# Altium PCB Motherboard.PcbDoc (part 3 of 5)
Units mm, origin at the board's own origin, x right, y up, seen from the top; angles counter-clockwise.
Board outline 133.86 x 67.84 mm, 4 copper layers (Top Layer, Power Plane, Ground Plane, Bottom Layer), stack 1.586 mm thick; 260 components, 155 nets, 877 pads, 1037 vias.
Unrouted connection lines stored in the file: 43.
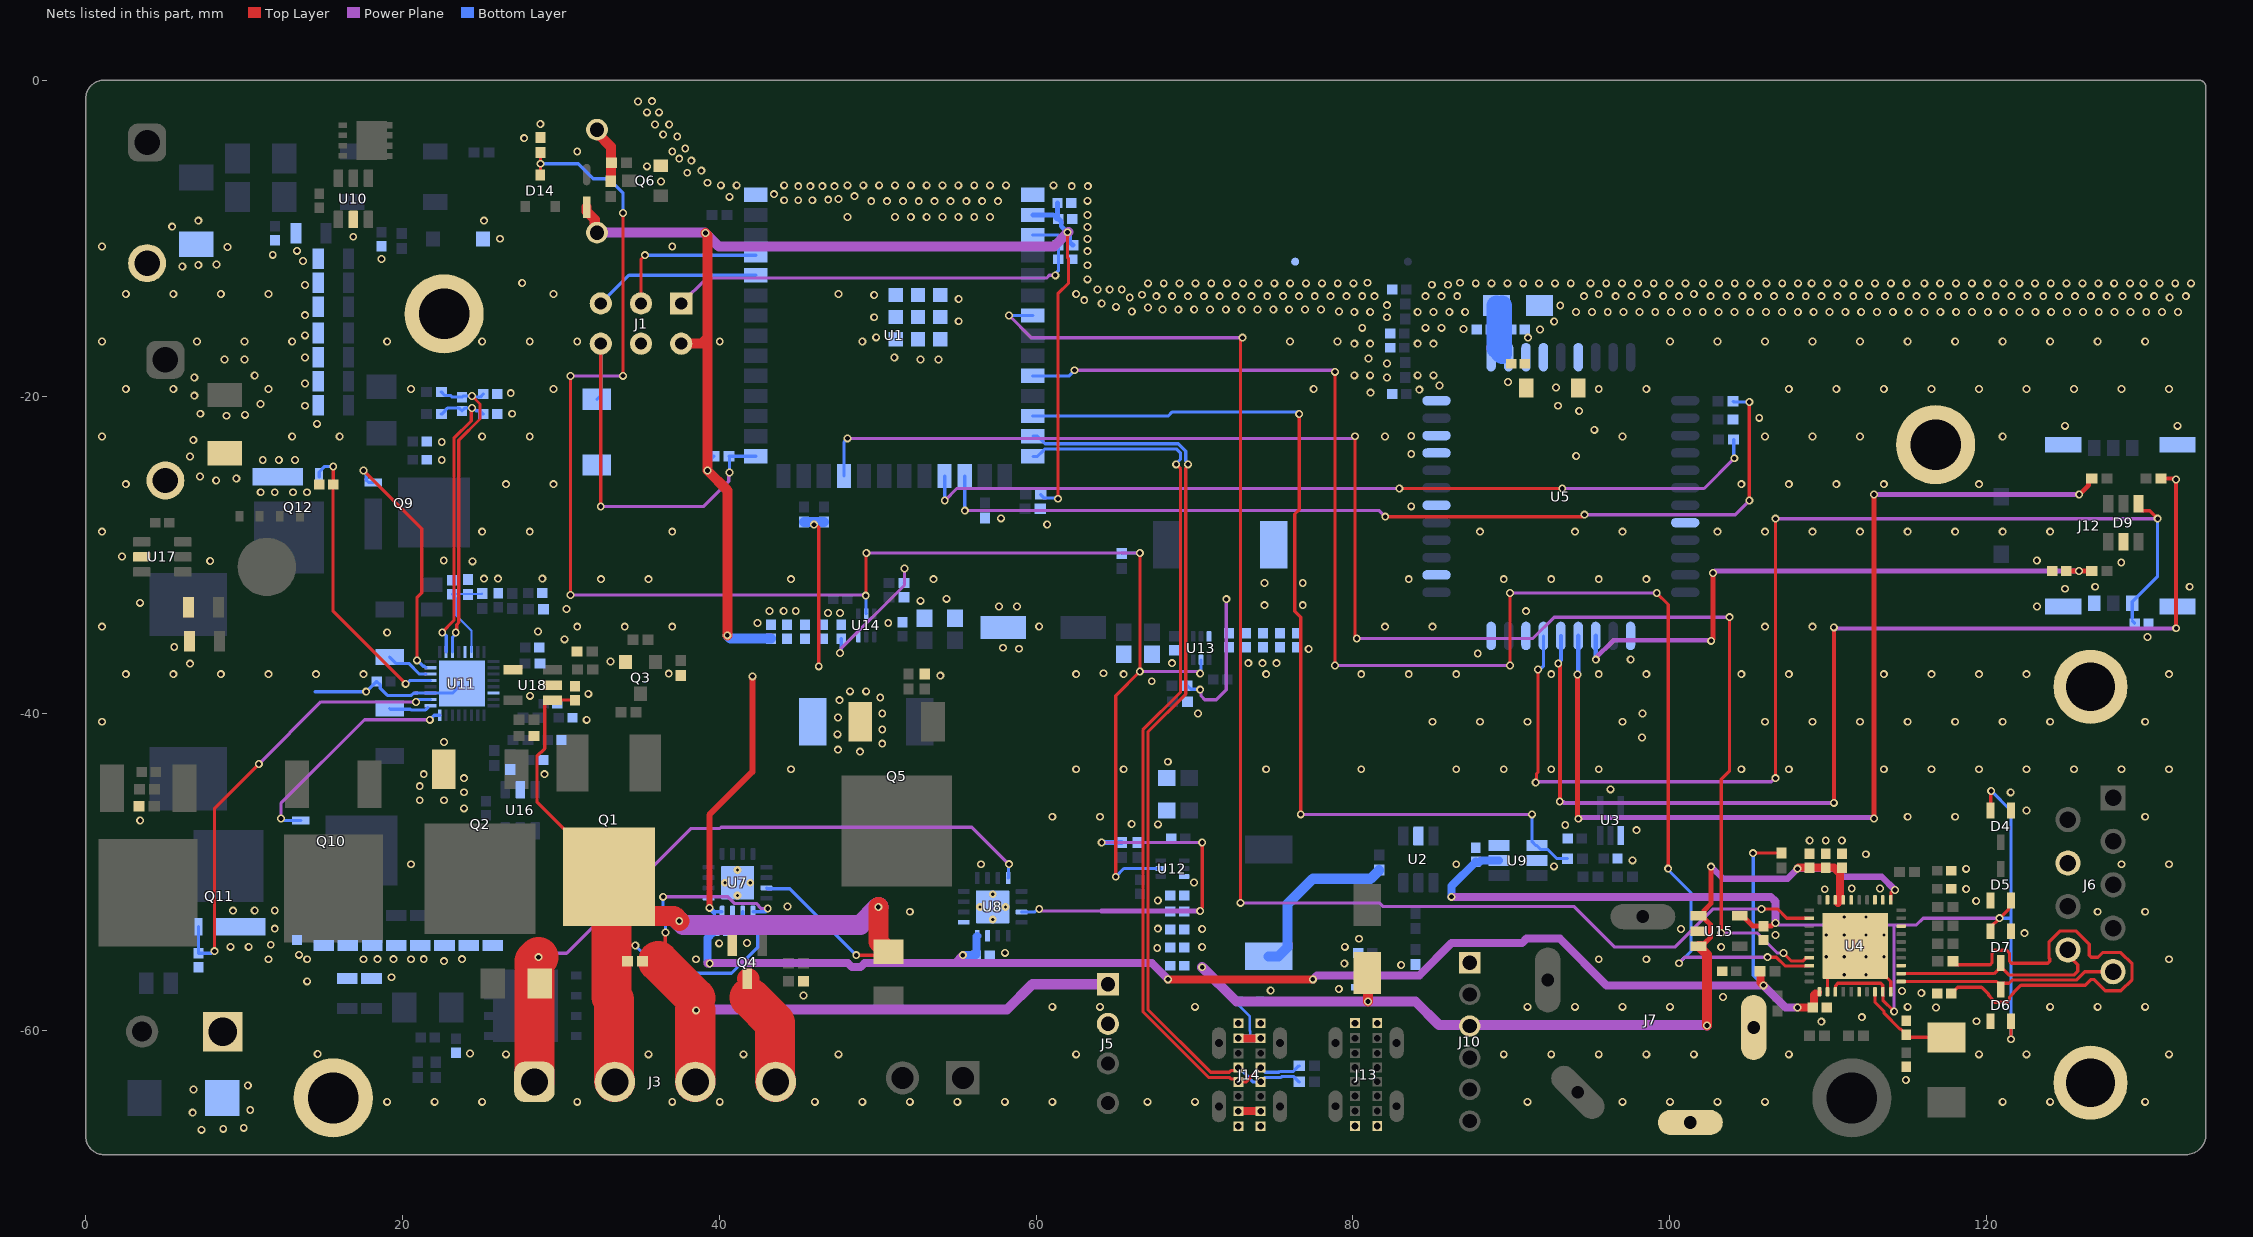
[diagram p4: the nets of this part, all layers, seen from the top]

## Part data (continued)
D14: library part CMP-0417-00003-1, "Schottky Barrier Diode, 30 V, 2 uA, -55 to 150 degC, 3-Pin SOT23, RoHS, Tape and Reel", LCSC_PN=C181200, Manufacturer="NXP Semiconductors", Temperature Range="-55 to 150 degC", Cd (pF)=10, ComponentLink1Description="Manufacturer URL", ComponentLink1URL=http://www.nxp.com/, ComponentLink2Description=Datasheet, ComponentLink2URL=http://www.nxp.com/documents/data_sheet/BAT54_SER.pdf, DatasheetVersion="Rev. 5", IR (uA)=2, Mounting Technology="Surface Mount", PackageDescription="3-Pin Plastic Surface-mounted Package, Body 1.3 x 2.9 mm, Pitch 0.95 mm", PackageReference=SOT23-3, Packing="Tape and Reel", PartNumber=BAT54C, RoHS=TRUE, Rth(j-a) (K/W)=500, Trr (ns)=5, VF (mV)=800, VR (V)=30
D15: library part CMP-2000-05974-1, "Surface Mount Zener Diode, 3 V, -65 to 150 degC, 2-Pin SOD123, RoHS, Tape and Reel", Ir - Reverse Current=10uA, LCSC_PN=C85212, Manufacturer=DiodesIncorporated, Maximum Operating Temperature=+150C, Minimum Operating Temperature=-65C, Package / Case=SOD-123, Package Description="2-Pin Surface Mount Device, Body 2.7 x 1.55 mm", Package Reference=SOD123, Pd - Power Dissipation=500mW, Voltage Temperature Coefficient=-1.75mV/C, Voltage Tolerance=5%, Vz - Zener Voltage=3V, Zener Current=5mA, Brand=DiodesIncorporated, Configuration=Single, Datasheet URL=http://www.diodes.com/_files/datasheets/ds18004.pdf, Datasheet Version="Rev. 37-2, 09/2012", Factory Pack Quantity=3000, Height=1.35mm, Length=2.85mm, Manufacturer URL=http://www.diodes.com/, Mounting Style=SMD/SMT, Mounting Technology=SurfaceMount, Packaging=Reel, Product Category=ZenerDiodes, RoHS=True, Series=BZT52C, Termination Style=SMD/SMT, Unit Weight=0.000353oz, Width=1.7mm, Zz - Zener Impedance=95Ohms
D16: library part CMP-14399-000022-1, "DIODE GEN PURP 100V 250MA SC76-2", LCSC_PN=C549222, RoHS Compliant=Yes
J1: library part CMP-bcf575fbeff46332-1, "Dual Row Connector Female Samtec SLW-103-01-T-D", Color=Black, LCSC_PN=C492420, Manufacturer Part Number=SLW-103-01-T-D, Operating Temperature="105 °C (max)", Voltage Rating (AC)="400 V", Contact Material="Phosphor Bronze", Contact Plating=Tin, Gender=Female, Housing Color=Black, Housing Material=Plastic, Lead-Free Status="Lead Free", Mounting Style="Through Hole, Vertical", Number of Contacts=6, Number of Positions=6, Number of Rows=2, Octopart URL=https://octopart.com/slw-103-01-t-d-samtec-292455, OctopartID=bcf575fbeff46332, Packaging=Tube, Pin Pitch="2.54 mm", REACH SVHC Compliance="No SVHC", RoHS=Compliant, Size-Height="4.57 mm", Size-Length="7.62 mm", Size-Width="4.95 mm"
J3: library part CMP-03913-99613968-2, "Terminal Block PCB Header with Plastic Latches, Through Hole, 5.08mm Pitch, Straight, 4 Poles", LCSC_PN=C441388
J4: "Connector", LCSC_PN=C22365241, Manufacturer_Name="Ningbo Kangnex", Datasheet Link=https://datasheet.lcsc.com/szlcsc/Ningbo-Kangnex-Elec-WJ15EDGVC-3-81-2P_C8396.pdf, Height=9.35mm, Manufacturer_Part_Number=WJ15EDGVC-3.81-2P
J5: library part CMP-17439-000250-1, "CONN HEADER VERT 4POS 2.5MM", Color=Natural, Contact Resistance=20mR, Current Rating=3A, Flammability Rating="UL94 V-0", Housing Color=White, Insulation Resistance=1GR, LCSC_PN=C144395, Max Operating Temperature=85°C, Max Voltage Rating (AC)=250V, Min Operating Temperature=-25°C, Package Quantity=500, Connector Type=Header, Contact Finish - Mating=TIN, Contact Material=Brass, Contact Plating=Tin, Contact Shape=Square, Contact Type="Male Pin", Depth=5.75mm, Fastening Type=Detent, Gender=Male, Housing Material=Polyamide, Insulation Color=Natural, Insulation Material=Nylon, Lead Free="Lead Free", Lead Pitch=2.5mm, Length=12.4mm, Mated Stacking Heights=9.8mm, Material=Polyamide, Max Current Rating=3A, Max Voltage Rating (DC)=250V, Mount="Through Hole", Number of Contacts=4, Number of Positions=4, Number of Rows=1, Orientation=Straight, Packaging=Bulk, Pitch=2.5mm, REACH SVHC="No SVHC", Series=XH, Termination=Solder, Voltage Rating=250V, Voltage Rating (AC)=250V, Wire/Cable Gauge=22AWG
J6: library part CMP-03367-000004-1, "CONN D-SUB RCPT 9POS VERT SOLDER", Current Rating=6A, LCSC_PN=C189689, Manufacturer="TE Connectivity", Temperature="-55°C to +105°C", Temperature Range High=+105°C, Temperature Range Low=-55°C, Automotive=No, Category=Conn, ComponentLink2Description=Datasheet, ComponentLink2URL=https://www.te.com/commerce/DocumentDelivery/DDEController?Action=showdoc&DocId=Customer+Drawing%7F5747706%7FB%7Fpdf%7FEnglish%7FENG_CD_5747706_B.pdf%7F2-5747706-0, Conn Gender=Female, Conn Orientation=Vertical, Contact Material=Gold,Nickel, Device Class L1=Connectors, Device Class L2="D-Sub Connectors", Device Class L3=unset, Digikey Description="CONN D-SUB RCPT 9POS VERT SOLDER", Height=0.494inch, Is Female=yes, Lead Free=Yes, Manufacturer Part Number=2-5747706-0, Mouser Description="D-Sub Standard Connectors RECP FRNT MTL SHL 9P retention inserts", Number of Contacts=9, Octopart=https://octopart.com/2-5747706-0-te+connectivity-39499683, Package=2-5747706-0, Pitch=2.74mm, RoHS=TRUE, Shielding=true
J7: JLCPCB Part Class="Extended Part", LCSC_PN=C309284, Manufacturer=HOOYA(皓宇电子), Contributor=LCSC, Manufacturer Part=PJ-612, spicePre=J, spiceSymbolName=PJ-612, Supplier=LCSC, Supplier Part=C309284
J8 J11: library part CMP-1502-02408-3, "7.62MM Pitch Straight Pluggable Term Block, Pcb Header, Through Hole, 2 Way", Color=Green, Current=20A, LCSC_PN=C19724644, Voltage=300V, Contact Gender=Male, Contact Material=Brass, Current Rating=20A, Gender=Male, Height=16mm, Lead Pitch=7.62mm, Length=8.5mm, Mount="Through Hole", Number of Contacts=2, Number of Levels=1, Number of Pins=2, Number of Positions Per Level=2, Number of Rows=1, Orientation=Vertical, Packaging=Box, Pitch=7.62mm, RoHS=Compliant, Termination=Solder, Width=15.24mm
J9: library part CMP-7a42b7ee166ba585-1, "Terminal block, 5mm 2 Pos, through hole male.", LCSC_PN=C8445, Manufacturer Part Number="2EDGK-5.08-02P-14-00AH + 2EDGVC-5.08-02P", Manufacturer Part Number 2="WJ2EDGVC-5.08-2P + WJ2EDGK-5.08-2P", Octopart URL=https://octopart.com/2edgk-5.08-02p-14-00ah-degson-78006607, OctopartID=7a42b7ee166ba585
J10: "Connector", LCSC_PN=C495261, Manufacturer_Name="JST (JAPAN SOLDERLESS TERMINALS)", Manufacturer_Part_Number=B6B-PH-K(LF)(SN), Mouser Part Number=306-B6BPHKLFSNP, Datasheet Link=https://www.jst-mfg.com/product/pdf/eng/ePH.pdf, Height=6mm, Mouser Price/Stock=https://www.mouser.co.uk/ProductDetail/JST-Commercial/B6B-PH-KLFSN?qs=cdbOS8ANM9DNW35JVflPvg%3D%3D
J12: "Connector", LCSC_PN=C585349, Manufacturer_Name=Molex, Mouser Part Number=N/A, Arrow Part Number=1042240820, Arrow Price/Stock=https://www.arrow.com/en/products/1042240820/molex?utm_currency=USD&region=asia, Datasheet Link=https://www.molex.com/en-us/products/part-detail-pdf/1042240820?display=pdf, Height=1.21mm, Manufacturer_Part_Number=1042240820, Mouser Price/Stock=https://www.mouser.com/Search/Refine.aspx?Keyword=N%2FA
J13 J14: JLCPCB Part Class="Extended Part", LCSC_PN=C3151747, Manufacturer="SHOU HAN(首韩)", Contributor=lcsc, Manufacturer Part="TYPE-C 16PLC-H10.0", spicePre=U, spiceSymbolName="TYPE-C 16PLC-H10.0", Supplier=LCSC, Supplier Part=C3151747
L1: "Inductor", LCSC_PN=C19268665, Manufacturer_Name=Bourns, Mouser Part Number=652-SRP1265A-3R3M, Arrow Part Number=SRP1265A-3R3M, Arrow Price/Stock=https://www.arrow.com/en/products/srp1265a-3r3m/bourns?utm_currency=USD&region=nac, Datasheet Link=https://www.bourns.com/data/global/pdfs/SRP1265A.pdf, Height=6.5mm, Manufacturer_Part_Number=SRP1265A-3R3M, Mouser Price/Stock=https://www.mouser.co.uk/ProductDetail/Bourns/SRP1265A-3R3M?qs=7z%252BmIopC6%2FKn2Zz%252BiwrXSg%3D%3D
L2 L3 L4: library part CMP-06042-006799-1, "Shielded Wirewound Inductor 3.3uH 30% 6800mA 0.0144Ω SMD", Case/Package=SMD/SMT, Current Rating=6.8A, DC Resistance (DCR)=14.4mR, Inductance=3.3uH, LCSC_PN=C514864, Resistor Type=Wirewound, Saturation Current=7.7A, Test Frequency=100kHz, Tolerance=30%, Core Material=Ferrite, Height - Seated (Max)=0.177inch, Length=0.315inch, Max DC Current=6.8A, Mount="Surface Mount", Number of Pins=2, Packaging="Tape and Reel", Shielding=Shielded, Width=0.315inch
NT1: "Net Tie SMD"
Q1: library part CMP-3103264-6, "Single P-Channel 30 V 4.5 mOhm 100 nC OptiMOS Power Mosfet - TO-252-3-11", LCSC_PN=C845609, Manufacturer Part Number 2=WSF70P03, Operating Temperature="175 °C (max)", Lead-Free Status="Lead Free", Manufacturer Part Number=IPD90P03P404ATMA1, Mounting Style="Surface Mount", Number of Pins=3, Octopart URL=https://octopart.com/ipd90p03p404atma1-infineon-21386769, OctopartID=f6ad3ee185da296a, Packaging=Reel, Polarity=P-Channel, REACH SVHC Compliance="No SVHC", RoHS=Compliant
Q2 Q5: library part CMP-32901-000143-1, "MOSFET N-CH 30V 161A DPAK", Continuous Drain Current=161A, Drain To Source Breakdown Voltage=30V, Drain To Source Resistance=3.2mΩ, Gate To Source Voltage=20V, Input Capacitace At Vds="4380pF @ 15V", LCSC_PN=C21988, Manufacturer=Infineon, Max Forward Diode Voltage=1V, Max Junction Temp=+175°C, Package=PG-TO252-3, Power Dissipation=140W, Pulse Drain Current=620A, Temperature="-55°C to +175°C", Temperature Range Low=-55°C, Automotive=No, Category=Trans, ComponentLink2Description=Datasheet, ComponentLink2URL=https://www.infineon.com/dgdl/irlr7843pbf.pdf?fileId=5546d462533600a40153566de53526d8, Depletion Mode=False, Device Class L1="Discrete Semiconductors", Device Class L2=Transistors, Device Class L3=MOSFETs, Digikey Description="MOSFET N-CH 30V 161A DPAK", Drain To Source Voltage=30V, Footprint Url=https://www.infineon.com/cms/en/product/packages/PG-TO252/PG-TO252-3-901/, Gate Charge At Vgs="34nC @ 4.5V", Height=2.52mm, Lead Free=Yes, Manufacturer Part Number=IRLR7843TRPBF, Number Of Channels=1, Number Of N Channels=1, Octopart=https://octopart.com/irlr7843trpbf-infineon-65875062, Reverse Recovery Charge=36nC, Reverse Recovery Time=39ns, RoHS=TRUE, Rthja Max=50°C/W, Temperature Range High=+175°C, Threshold Vgs Max=2.3V, Threshold Vgs Min=1.4V, Turn Off Delay Time=34ns, Turn On Delay Time=25ns
Q3 Q6: library part CMP-2000-04929-2, "MOSFET N-CH 60V 115MA SOT23-3", Case/Package=SOT-23, Continuous Drain Current (ID)=115mA, Drain To Source Breakdown Voltage=70V, Drain To Source Resistance=7.5R, Drain to Source Voltage (Vdss)=60V, Gate to Source Voltage (Vgs)=20V, Input Capacitance=50pF, LCSC_PN=C65189, Max Operating Temperature=150°C, Max Power Dissipation=300mW, Min Operating Temperature=-55°C, Package Quantity=3000, Power Dissipation=540mW, Threshold Voltage=2.5V, Contact Plating=Tin, Current Rating=115mA, Dual Supply Voltage=60V, Element Configuration=Single, Fall Time=5.6ns, Height=1mm, Lead Free="Lead Free", Length=2.9mm, Mount="Surface Mount", Nominal Vgs=2.5V, Number Of Channels=1, Number of Elements=1, Number of Pins=3, On-State Resistance=7.5R, Packaging="Tape and Reel", Radiation Hardening=No, Rds On Max=7.5R, REACH SVHC="No SVHC", Rise Time=3ns, Termination=SMD/SMT, Turn-Off Delay Time=11ns, Turn-On Delay Time=7ns, Voltage=60V, Voltage Rating (DC)=60V, Weight=0.000282oz, Width=1.3mm
Q4: "Transistor", LCSC_PN=C143946, Manufacturer_Name=Infineon, Mouser Part Number=942-IRLML6244TRPBF, Arrow Part Number=IRLML6244TRPBF, Arrow Price/Stock=https://www.arrow.com/en/products/irlml6244trpbf/infineon-technologies-ag?region=nac, Datasheet Link=http://www.infineon.com/dgdl/irlml6244pbf.pdf?fileId=5546d462533600a4015356686fed261f, Height=1.12mm, Manufacturer_Part_Number=IRLML6244TRPBF, Mouser Price/Stock=https://www.mouser.co.uk/ProductDetail/Infineon-IR/IRLML6244TRPBF?qs=9%252BKlkBgLFf1HkY%2F2U%252BIhLQ%3D%3D
Q7 Q8: "MOSFET (N-Channel)", LCSC_PN=C5297617, Manufacturer_Name="Alpha & Omega Semiconductors", Arrow Part Number=AON7528, Arrow Price/Stock=https://www.arrow.com/en/products/aon7528/alpha-and-omega-semiconductor?utm_currency=USD&region=nac, Datasheet Link=http://aosmd.com/res/data_sheets/AON7528.pdf, Manufacturer_Part_Number=AON7528
Q9 Q10 Q11 Q12: library part CMP-32901-000139-1, "TRENCH <= 40V", Continuous Drain Current=17A, Drain To Source Breakdown Voltage=40V, Drain To Source Resistance=4.7mΩ, Gate To Source Voltage=20V, Input Capacitace At Vds="640pF @ 20V", LCSC_PN=C534356, Manufacturer=Infineon, Max Forward Diode Voltage=1V, Max Junction Temp=+175°C, Package=PG-TDSON-8, Power Dissipation=3W, Pulse Drain Current=236A, Temperature="-55°C to +175°C", Temperature Range Low=-55°C, Typ Forward Diode Voltage=0.92V, Automotive=No, Category=Trans, ComponentLink2Description=Datasheet, ComponentLink2URL=https://www.infineon.com/dgdl/Infineon-BSC059N04LS6-DS-v02_00-EN.pdf?fileId=5546d462689a790c0168bd22cfc6481f, Depletion Mode=False, Device Class L1="Discrete Semiconductors", Device Class L2=Transistors, Device Class L3=MOSFETs, Digikey Description="TRENCH <= 40V", Drain To Source Voltage=40V, Footprint Url=https://www.infineon.com/cms/en/product/packages/PG-TDSON/PG-TDSON-8-17/, Gate Charge At Vgs="9.4nC @ 10V", Height=1.1mm, Lead Free=Yes, Manufacturer Part Number=BSC059N04LS6ATMA1, Number Of Channels=1, Number Of N Channels=1, Octopart=https://octopart.com/bsc059n04ls6atma1-infineon-98039929, Reverse Recovery Charge=22nC, Reverse Recovery Time=13ns, RoHS=TRUE, Rthja Max=50°C/W, Temperature Range High=+175°C, Threshold Vgs Max=2.3V, Threshold Vgs Min=1.3V, Transconductance=100S, Turn Off Delay Time=8ns, Turn On Delay Time=3ns
Q13: "MOSFET (P-Channel)", LCSC_PN=C13899, Manufacturer_Name="Alpha & Omega Semiconductors", Arrow Part Number=AON6407, Arrow Price/Stock=https://www.arrow.com/en/products/aon6407/alpha-and-omega-semiconductor?utm_currency=USD&region=nac, Datasheet Link=http://www.aosmd.com/res/data_sheets/AON6407.pdf, Manufacturer_Part_Number=AON6407
Q14: library part CMP-83955-000025-1, "MOSFET N-CH 40V 22A/32A 8DFN", Case/Package=DFN, Continuous Drain Current (ID)=32A, Drain to Source Voltage (Vdss)=40V, Input Capacitance=2.2nF, LCSC_PN=C182465, Max Operating Temperature=150°C, Max Power Dissipation=35.7W, Min Operating Temperature=-55°C, Package Quantity=3000, Mount="Surface Mount", Packaging="Cut Tape", Rds On Max=4.8mR, RoHS Compliant=Yes, Series=-
Q15 Q16: "MOSFET (P-Channel)", LCSC_PN=C400894, Manufacturer_Name="Alpha & Omega Semiconductors", Arrow Part Number=AOD4185, Arrow Price/Stock=https://www.arrow.com/en/products/aod4185/alpha-and-omega-semiconductor?utm_currency=USD&region=europe, Datasheet Link=http://aosmd.com/res/data_sheets/AOD4185.pdf, Height=2.4mm, Manufacturer_Part_Number=AOD4185
R1 R2 R3 R4 R8 R11 R12 R15 R20 R21 R23 R24 R25 R37 R64 R72 R73 R75 R76 R78 R80 R81: library part CMP-2002-07472-1, LCSC_PN=C190095
R5 R6: library part CMP-2002-07472-1, LCSC_PN=C105871
R7 R58: library part CMP-2002-07472-1, LCSC_PN=C138003
R9 R14 R22 R41 R42 R43 R45 R47 R83: library part CMP-2002-07472-1, LCSC_PN=C106233
R10 R28 R36 R38: library part CMP-2002-07472-1, LCSC_PN=C106235
R13 R19: library part CMP-2002-07472-1, LCSC_PN=C2139031
R16 R53 R54: library part CMP-2002-07472-1, LCSC_PN=C844114
R17 R48 R49 R59: library part CMP-0abdc173b10ad57a-1, Case/Package=1206, LCSC_PN=C728276, Manufacturer Part Number=WSLP12065L000FEA, Manufacturer Part Number 2=FMF06FTHR005-LHL, Power=1W, Resistance=0,024, Lifecycle Status="Not Listed by Manufacturer", Octopart URL=https://octopart.com/1-2176055-0-te+connectivity-46440145, OctopartID=0abdc173b10ad57a, OrderingCode=WSLP12065L000FEA, Packaging="Tape & Reel (TR)"
R18 R34 R35 R39 R40 R55 R56 R82: library part CMP-2002-07472-1, LCSC_PN=C60485
R26 R27 R29 R30 R31 R32 R33: library part CMP-2002-07472-1, LCSC_PN=C413066
R44: library part CMP-2002-07472-1, LCSC_PN=C852697
R46: library part CMP-0abdc173b10ad57a-1, "0.005R 1206 0.5W 1%", Case/Package=1206, LCSC_PN=C728282, Manufacturer Part Number=WSLP12065L000FEA, Manufacturer Part Number 2=FMF06FTHR005-LHL, Power=1W, Resistance=0,024, Lifecycle Status="Not Listed by Manufacturer", Octopart URL=https://octopart.com/1-2176055-0-te+connectivity-46440145, OctopartID=0abdc173b10ad57a, OrderingCode=WSLP12065L000FEA, Packaging="Tape & Reel (TR)"
R50 R51: library part CMP-0abdc173b10ad57a-1, Case/Package=1206, LCSC_PN=C17885, Manufacturer Part Number=WSLP12065L000FEA, Manufacturer Part Number 2=FMF06FTHR005-LHL, Power=1W, Resistance=0,024, Lifecycle Status="Not Listed by Manufacturer", Octopart URL=https://octopart.com/1-2176055-0-te+connectivity-46440145, OctopartID=0abdc173b10ad57a, OrderingCode=WSLP12065L000FEA, Packaging="Tape & Reel (TR)"
R57: library part CMP-2000-07514-1, "Chip Resistor, 0 Ohm, 0.125 W, -55 to 125 degC, 0805 (2012 Metric), RoHS, Tape and Reel", Case Code (Imperial)=0805, Case Code (Metric)=2012, LCSC_PN=C100045, Manufacturer="TE Connectivity", Max Operating Temperature=125degC, Min Operating Temperature=-55degC, Number of Resistors=1, Package Description="2-Pin Surface Mount Device, Body 2 x 1.25 mm", Package Quantity=5000, Package Reference=RESC2013X65X40L15T20, Power Rating=125mW, Resistance=0mOhm, Tolerance=0%, Voltage Rating=150V, Case\/Package=0805, Composition=ThickFilm, Datasheet URL=www.te.com/commerce/DocumentDelivery/DDEController?Action=showdoc&DocId=Customer+Drawing%7F1623401%7FBA%7Fpdf%7FEnglish%7FENG_CD_1623401_BA.pdf%7F1623401-1, Datasheet Version="Rev. BA, 12/2009", Depth=1.25mm, ELV=Compliant, Height=0.55mm, Length=2mm, Manufacturer URL=http://www.te.com/, Mount=SurfaceMount, Mounting Technology=SurfaceMount, Number of Terminations=2, Packaging=TapeandReel, Radiation Hardening=No, RoHSCompliant=true, Termination=Solder, Weight=0.000194oz, Width=1.25mm
R60: library part CMP-2000-07514-1, "Chip Resistor, 0 Ohm, 0.125 W, -55 to 125 degC, 0805 (2012 Metric), RoHS, Tape and Reel", Case Code (Imperial)=0805, Case Code (Metric)=2012, LCSC_PN=C144579, Manufacturer="TE Connectivity", Max Operating Temperature=125degC, Min Operating Temperature=-55degC, Number of Resistors=1, Package Description="2-Pin Surface Mount Device, Body 2 x 1.25 mm", Package Quantity=5000, Package Reference=RESC2013X65X40L15T20, Power Rating=125mW, Resistance=0mOhm, Tolerance=0%, Voltage Rating=150V, Case\/Package=0805, Composition=ThickFilm, Datasheet URL=www.te.com/commerce/DocumentDelivery/DDEController?Action=showdoc&DocId=Customer+Drawing%7F1623401%7FBA%7Fpdf%7FEnglish%7FENG_CD_1623401_BA.pdf%7F1623401-1, Datasheet Version="Rev. BA, 12/2009", Depth=1.25mm, ELV=Compliant, Height=0.55mm, Length=2mm, Manufacturer URL=http://www.te.com/, Mount=SurfaceMount, Mounting Technology=SurfaceMount, Number of Terminations=2, Packaging=TapeandReel, Radiation Hardening=No, RoHSCompliant=true, Termination=Solder, Weight=0.000194oz, Width=1.25mm
R61 R62 R63 R65: library part CMP-2002-07472-1, LCSC_PN=C138066
R66: library part CMP-2002-07472-1, LCSC_PN=C852545
R67: library part CMP-2002-07472-1, LCSC_PN=C2076791
R68: library part CMP-2002-07472-1, LCSC_PN=C327367
R69: library part CMP-2002-07472-1, LCSC_PN=C138030
R70: library part CMP-2002-07472-1, LCSC_PN=C138009
R71: library part CMP-2002-07472-1, LCSC_PN=C137983
R74: library part CMP-2002-07472-1, LCSC_PN=C185398, Manufacturer="Yageo / Phycomp"
R77: library part CMP-2002-07472-1, LCSC_PN=C114756
R79: library part CMP-2002-07472-1, LCSC_PN=C93943
RF_PCB1: library part CMP-e704afk8c25r4a5ypw1c-12, "GSM900 and GSM1800  Frequency Bands PCB antenna", CustomComponentID=e704afk8c25r4a5ypw1c
S1: "Switch (4-Pin Push)", LCSC_PN=C47324878, Manufacturer_Name="C & K COMPONENTS", Manufacturer_Part_Number="PTS647SK70SMTR2N LFS", Datasheet Link=https://www.ckswitches.com/media/2567/pts647.pdf, Height=7mm
S2: "Switch", LCSC_PN=C720477, Manufacturer_Name=XUNPU, Datasheet Link=https://www.xunpudianzi.com/uploads/pdf/TS-1088-ARXXX.pdf, Height=2mm, Manufacturer_Part_Number=TS-1088-AR02016
U1: "Integrated Circuit", LCSC_PN=C2913198, Manufacturer_Name="Espressif Systems", Mouser Part Number=356-ESP32-S3WROOM1N8, Datasheet Link=https://www.espressif.com/sites/default/files/documentation/esp32-s3-wroom-1_wroom-1u_datasheet_en.pdf, Height=3.25mm, Manufacturer_Part_Number=ESP32-S3-WROOM-1-N8, Mouser Price/Stock=https://www.mouser.co.uk/ProductDetail/Espressif-Systems/ESP32-S3-WROOM-1-N8?qs=Wj%2FVkw3K%252BMC1mq0KGPvoSQ%3D%3D
U2: library part CMP-0337-00284-2, "Adjustable, Active High, Constant-Current, Current-Limited Power-Distribution Switch, 0.075 to 1.7 A Current Limit, -40 to 85 degC, 6-pin SOT-23 (DBV), Green (RoHS & no Sb/Br)", Continuous Current(Max)(A)=1.5, Current Limit Accuracy @ 1A="+/-7.5% (925mA min / 1075mA max)", Current Limit Topology=Constant-Current, Current Limit(A)="0.075 to 1.7", LCSC_PN=C55266, Manufacturer="Texas Instruments", Rating=Catalog, Code_JEDEC=MO-178-AB*, ComponentLink1Description=Datasheet, ComponentLink1URL=http://www.ti.com/general/docs/lit/getliterature.tsp?genericPartNumber=TPS2553&fileType=pdf, DatasheetVersion=SLVS841E, Eco-Plan="Green (RoHS & no Sb/Br)", Enable="Active High", Mounting Technology="Surface Mount", Number of Switches=1, PackageDescription="6-Pin Plastic Small-Outline Package, 2.9 x 1.6 mm Body, 0.95 mm Pitch, 2.8 mm Lead Span", PackageReference=DBV0006A, PackageVersion="revK, Mar-2006", PartNumber=TPS2553DBVR, rDS(on) per FET(Typ)(mOhms)="100/DRV, 85/DBV", Vin(Max)(V)=6.5, Vin(Min)(V)=2.5
U3: "Integrated Circuit", Arrow Part Number=LM4040EIM7-2.0/NOPB, LCSC_PN=C1848440, Manufacturer_Name="Texas Instruments", Mouser Part Number=595-M4040EIM7-2.0NPB, Arrow Price/Stock=https://www.arrow.com/en/products/lm4040eim7-2.0nopb/texas-instruments, Datasheet Link=http://www.ti.com/lit/ds/symlink/lm4040-n.pdf, Height=1.1mm, Manufacturer_Part_Number=LM4040EIM7-2.0/NOPB, Mouser Price/Stock=https://www.mouser.co.uk/ProductDetail/Texas-Instruments/LM4040EIM7-2.0-NOPB?qs=2k4gZbgf%2F9k9BIpEqTAQVA%3D%3D
U4: library part CMP-0767-00003-2, "Integrated Analog Front End for Pulse Oximeter, 2 to 3.6 V Rx, 3 to 5.25 V Tx, -40 to 85 degC, 40-Pin VQFN (RHA), RoHS, Tape and Reel", LCSC_PN=C2651608, Manufacturer="Texas Instruments", Operating Temperature Range="-40 to 85 degC", # Input Channels=1, AFE Analog Supply="2 to 3.6 V", AFE Digital Supply="2 to 3.6 V", CMRR="75 dB", ComponentLink1Description="Manufacturer URL", ComponentLink1URL=http://www.ti.com/, ComponentLink2Description=Datasheet, ComponentLink2URL=http://www.ti.com/lit/ds/symlink/afe4490.pdf, ComponentLink3Description="Package Specification", ComponentLink3URL=http://www.ti.com.cn/cn/lit/ml/mpqf135c/mpqf135c.pdf, DatasheetVersion=SBAS602F, Mounting Technology="Surface Mount", PackageDescription="40-Pin Plastic Quad Flatpack No-Lead, Body 6 x 6 mm, Pitch 0.5 mm", PackageReference=RHA-40, PackageVersion=4204276/E, Packing=RHA0040B, PartNumber=AFE4490RHAR, Resolution="22 Bits", RoHS=TRUE, Sample Rate (max)="1.3 KSPS", Transmit Controller Supply="3 to 5.25 V"
U5: library part CMP-72dbb8ea0133ad1c-5, "Module: GSM/Bluetooth; GPRS; 2G; 1800MHz, 900MHz; 85.6kbps; SMD", LCSC_PN=C2981431, Manufacturer Part Number=SIM800C, Mounting Style="Surface Mount", Octopart URL=http://octopart.com/sim800c-simcom-54220430, OctopartID=72dbb8ea0133ad1c
U7 U8: library part CMP-0704-00001-2, "Triple Channel Shunt and Bus Voltage Monitor, 120 dB, 2.7 to 5.5 V, -40 to 125 degC, 16-Pin VQFN (RGV), Green (RoHS & no Sb/Br), Tape and Reel", LCSC_PN=C181255, Manufacturer="Texas Instruments", Offset Voltage (max)="+/- 80 uV", Operating Supply Range="2.7 to 5.5 V", Quiescent Current (Typ)="350 uA", Rating=Catalog, Temperature Range="-40 to 125 degC", Voltage Input Range (Bus)="0 to 26 V", CMR (Typ)="120 dB", ComponentLink1Description="Manufacturer URL", ComponentLink1URL=http://www.ti.com/, ComponentLink2Description=Datasheet, ComponentLink2URL=http://www.ti.com/lit/ds/symlink/ina3221.pdf, ComponentLink3Description="Package Specification", ComponentLink3URL=http://www.ti.com/lit/ds/symlink/ina3221.pdf, DatasheetVersion=SBOS576A, Gain="1 V/V", Gain Error (max)=0.25%, Mounting Technology="Surface Mount", PackageDescription="16-Pin Quad Flat No-lead Package, Body 4 x 4 mm, Pitch 0.65 mm", PackageReference=RGV0016A, PackageVersion=SBOS576A, Packing="Tape and Reel", PartNumber=INA3221AIRGVR, RoHS=TRUE
U9: library part CMP-0003-00257-2, "16-Bit Delta-Sigma ADC with Internal Reference, PGA and Oscillator, I2C Serial Interface, -40 to 85 degC, 6-pin SOT23 (DBV6), Green (RoHS & no Sb/Br)", Analog Voltage AV/DD(Max)(V)=5.5, Analog Voltage AV/DD(Min)(V)=2.7, LCSC_PN=C16598, Manufacturer="Texas Instruments", # Input Channels=1, Architecture=Delta-Sigma, Code_JEDEC=MO-178, ComponentLink1Description="Manufacturer URL", ComponentLink1URL=http://www.ti.com/, ComponentLink2Description=Datasheet, ComponentLink2URL=http://www.ti.com/general/docs/lit/getliterature.tsp?genericPartNumber=ADS1110&fileType=pdf, ComponentLink3Description="Package Specification", ComponentLink3URL=http://www.ti.com/litv/pdf/mpds026h, DatasheetVersion=SBAS276A, Digital Supply(Max)(V)=5.5, Digital Supply(Min)(V)=2.7, Eco-Plan="Green (RoHS & no Sb/Br)", Interface="Serial I2C", Mounting Technology="Surface Mount", PackageDescription="6-Pin Plastic Small Outline, Body 1.6 x 2.9 mm, Pitch 0.95 mm", PackageReference=DBV6, PackageVersion="4073253-5/K, 03/2006", PartNumber=ADS1110A0IDBVR, Resolution(Bits)=16, Sample Rate (max)(SPS)=240, SubFamily="Precision ADC (<=10MSPS)"
U10 U16 U17: library part CMP-04910-000003-1, "POWER MANAGEMENT", Ambient Temperature Range High=+125°C, Ambient Temperature Range Low=-40°C, LCSC_PN=C2941042, Manufacturer="Texas Instruments", Max Junction Temp=+150°C, Max Supply Voltage=65V, Min Supply Voltage=3.2V, Nominal Supply Current=80uA, Package=DBV0006A, Temperature="-40°C to +125°C", Automotive=Yes, Automotive Grade="Grade 1", Category=IC, ComponentLink2Description=Datasheet, ComponentLink2URL=http://www.ti.com/lit/ds/symlink/lm74700-q1.pdf, Device Class L1="Integrated Circuits (ICs)", Device Class L2="Power Management ICs", Device Class L3=unset, Digikey Description="POWER MANAGEMENT", Height=1.45mm, Lead Free=Yes, Manufacturer Part Number=LM74700QDBVRQ1, Mouser Description="Low Iq, ideal diode controller 6-SOT-23 -40 to 125", Number Of Outputs=1, Octopart=https://octopart.com/lm74700qdbvrq1-texas+instruments-87700446, RoHS=TRUE, Standoff Height=0mm, Temperature Range High=+125°C, Temperature Range Low=-40°C
U11: "Integrated Circuit", LCSC_PN=C5219071, Manufacturer_Name="Texas Instruments", Mouser Part Number=595-BQ25730RSNR, Arrow Part Number=BQ25730RSNR, Arrow Price/Stock=https://www.arrow.com/en/products/bq25730rsnr/texas-instruments?region=nac, Datasheet Link=https://www.ti.com/lit/ds/symlink/bq25730.pdf?ts=1623420063043&ref_url=https%253A%252F%252Fwww.ti.com%252Fstore%252Fti%252Fen%252Fp%252Fproduct%252F%253Fp%253DBQ25730RSNR, Height=0.8mm, Manufacturer_Part_Number=BQ25730RSNR, Mouser Price/Stock=https://www.mouser.co.uk/ProductDetail/Texas-Instruments/BQ25730RSNR?qs=stqOd1AaK78USmb51n%2Fwlg%3D%3D
U12 U13 U14: library part CMP-04918-000435-1, "POWER MANAGEMENT", LCSC_PN=C779412
U15: BOM_JLCPCB Part Class="Extended Part", BOM_Manufacturer=EXAR, LCSC_PN=C9055, BOM_Manufacturer Part=SPX3819M5-L-3-3/TR, BOM_Supplier=LCSC, BOM_Supplier Part=C9055, spicePre=U, spiceSymbolName=SPX3819M5-L-3-3/TR
U18: "Integrated Circuit", LCSC_PN=C2653784, Manufacturer_Name="Texas Instruments", Mouser Part Number=595-UCC27517ADBVR, Arrow Part Number=UCC27517ADBVR, Arrow Price/Stock=https://www.arrow.com/en/products/ucc27517adbvr/texas-instruments.html?utm_currency=USD&region=nac, Datasheet Link=http://www.ti.com/lit/gpn/ucc27517a, Height=1.45mm, Manufacturer_Part_Number=UCC27517ADBVR, Mouser Price/Stock=https://www.mouser.co.uk/ProductDetail/Texas-Instruments/UCC27517ADBVR?qs=e5T%2FzGlhGOZhJZidb%252B7EgQ%3D%3D
Y1: library part CMP-2000-05033-2, "Crystal 8MHz ±20ppm 18pF SMD-2 5mm x 3.2mm", Case/Package=CSMD, ESR (Equivalent Series Resistance)=140R, Frequency=8MHz, Frequency Stability=30ppm, Frequency Tolerance=20ppm, LCSC_PN=C144380, Load Capacitance=18pF, Max Operating Temperature=85°C, Min Operating Temperature=-40°C, Package Quantity=1000, Resistor Type=Ceramic, Series Resistance=500R, Depth=3.2mm, Height=0.051inch, Lead Free="Lead Free", Length=5mm, Mount="Surface Mount", Number of Pins=2, Packaging="Tape and Reel", Radiation Hardening=No, RoHS Compliant=Yes, Termination=SMD/SMT, Tolerance=20ppm, Width=3.2mm

## Free pads (board coordinates)
  round 5 hole 3.2: 0(15.621,-64.262) 0(22.621,-14.756) 0(111.506,-64.262) 0(116.793,-23.011)

## Via types
v1: diameter 0.5, hole 0.3, Top Layer to Bottom Layer, tented both sides, 988 vias
v2: diameter 1.2, hole 0.8, Top Layer to Bottom Layer, tented both sides, 29 vias
v3: diameter 0.5, hole 0.2, Top Layer to Bottom Layer, 20 vias

## Nets (pads, with @x,y where several pads share a name; then routed paths per layer and width w, separated by ;. In a path a pad name is that pad's centre, name@x,y a point inside that pad or via, vN(x,y) a via of type N, cw(c..) or ccw(c..) an arc to the next point about the centre after c; other vN are vias at no path point)
3v3_ANA@250mA: C26.2 C96.2 D4.2 D5.2 D6.2 D7.2 U4.33 U4.39 U9.5 U15.5 | length 76.2
  Top Layer w0.203: U4.33@110.463,-57.56 110.476,-57.547 110.476,-57.164 110.617,-57.023 113.331,-57.023 113.45,-57.142 113.45,-57.547 U4.39@113.463,-57.56 113.463,-58.091 v1(114.173,-58.801) ; D7.2@120.254,-53.737 120.254,-53.487 v1(120.83,-52.911) 121.406,-52.335 121.406,-51.948 D5.2@121.554,-51.8 ; D4.2@120.254,-46.117 120.278,-46.093 120.278,-44.904 v1(120.302,-44.88) ; v1(121.549,-60.552) 121.576,-60.579 121.666,-60.579 121.554,-60.467 D6.2@121.554,-59.42
  Top Layer w0.305: U15.5@104.424,-52.771 104.624,-52.771 105.261,-53.408 C96.2@105.918,-53.408 106.424,-53.408 106.619,-53.213 v1(106.68,-53.213)
  Power Plane w0.203: v1(106.68,-53.213) 106.806,-53.339 114.173,-53.339 ; v1(114.173,-58.801) 114.173,-53.339 ; v1(120.83,-52.911) 115.998,-52.911 115.57,-53.339 114.173,-53.339
  Power Plane w0.508: v1(86.233,-51.562) 106.382,-51.562 106.68,-51.86 v1(106.68,-53.213)
  Bottom Layer w0.203: v1(120.302,-44.88) 120.269,-44.847 120.269,-44.831 121.549,-46.111 121.549,-52.959 ; v1(120.83,-52.911) 121.501,-52.911 121.549,-52.959 ; v1(121.549,-60.552) 121.549,-52.959
  Bottom Layer w0.508: v1(86.233,-51.562) 86.233,-50.879 87.757,-49.355 C26.2@87.757,-49.335 ; C26.2@87.813,-49.386 87.965,-49.386 88.075,-49.276 U9.5@89.224,-49.276
3v3_dig@2A: BUZ1.1 C2.2 C3.2 C11.2 C24.2 C25.2 C88.2 C89.2 C90.2 C91.2 C92.2 D16.1 J1.2 L4.2 R1.2 R2.2 R5.1 R6.1 R24.2 R25.2 R79.2 R81.2 U1.2 U4.31 U7.4 U7.5 U8.4 | length 217.1
  Top Layer w0.203: v1(45.972,-28.064) 45.974,-28.062 45.974,-27.907 46.277,-28.21 v1(46.277,-37.007) ; v1(61.375,-26.426) 61.375,-13.478 62.049,-12.803 62.049,-11.279 61.978,-11.208 v1(61.978,-9.603) ; v1@105.27,-48.801 R24.2@107.061,-48.801
  Top Layer w0.305: 109.22,-57.658 109.426,-57.658 109.463,-57.621 U4.31@109.463,-57.56
  Top Layer w0.381: v1(39.378,-52.257) 39.37,-52.265 39.37,-46.381 42.086,-43.665 v1(42.086,-37.642)
  Top Layer w0.508: v1(68.326,-56.769) v1(77.47,-56.769) ; R25.2@105.7,-56.264 105.734,-56.298 105.734,-56.966 v1(105.918,-57.15) ; v1(108.077,-58.547) C11.2@109.034,-58.547 109.054,-58.547 109.11,-58.491 109.11,-57.768 109.22,-57.658
  Top Layer w0.635: D16.1@31.623,-8.01 31.623,-8.291 32.132,-8.8 32.132,-9.484 BUZ1.1@32.273,-9.625 ; J1.2@37.437,-16.637 J1.2@37.592,-16.637 38.871,-16.637 39.243,-16.265 ; v1(39.116,-9.652) 39.243,-9.779 39.243,-16.265 ; v1(40.5,-35.052) 40.5,-25.895 v1(39.243,-24.638) 39.243,-16.265
  Power Plane w0.203: v1(47.619,-36.16) 47.676,-36.103 47.676,-35.89 51.689,-31.877 v1(51.689,-30.832)
  Power Plane w0.508: v1(39.391,-55.774) 39.264,-55.774 39.243,-55.753 48.13,-55.753 48.38,-56.003 48.902,-56.003 49.152,-55.753 54.864,-55.753 ; v1(55.372,-55.245) 54.864,-55.753 ; v1(68.326,-56.769) 67.31,-55.753 54.864,-55.753 ; v1(77.47,-56.769) 77.724,-56.515 84.201,-56.515 86.233,-54.483 90.688,-54.483 90.971,-54.2 93.062,-54.2 96.012,-57.15 v1(105.918,-57.15) 107.315,-58.547 v1(108.077,-58.547)
  Power Plane w0.635: BUZ1.1@32.273,-9.625 39.089,-9.625 v1(39.116,-9.652) 39.963,-10.499 61.123,-10.499 v1@62.049,-9.573
  Bottom Layer w0.203: v1(39.243,-24.638) 39.409,-24.472 39.409,-23.972 39.632,-23.749 R2.2@39.657,-23.749 ; U7.5@39.323,-51.648 39.329,-51.648 39.378,-51.696 v1(39.378,-52.257) ; C24.2@39.692,-53.721 39.692,-52.651 39.378,-52.337 v1(39.378,-52.257) ; U7.4@40.173,-52.498 39.699,-52.498 39.458,-52.257 v1(39.378,-52.257) ; v1(47.619,-36.16) 47.619,-36.079 47.701,-35.998 C92.2@47.701,-35.263 ; R79.2@51.656,-31.75 51.689,-31.717 v1(51.689,-30.832) ; R81.2@60.292,-26.162 60.515,-26.385 61.31,-26.385 61.341,-26.416 61.365,-26.416 v1(61.375,-26.426) ; v1(105.265,-48.806) 105.283,-48.788 105.283,-56.515 v1(105.918,-57.15)
  Bottom Layer w0.305: U1.2@59.791,-8.509 61.076,-8.509 C3.2@61.33,-8.763 ; C2.2@61.35,-7.747 61.35,-8.743 C3.2@61.33,-8.763 ; R1.2@62.324,-10.414 62.299,-10.414 62.126,-10.241 62.126,-9.804 61.978,-9.656 v1(61.978,-9.603) 61.587,-9.211 61.587,-8.921 61.429,-8.763 C3.2@61.409,-8.763 C3.2@61.33,-8.763
  Bottom Layer w0.508: v1(39.391,-55.774) 39.243,-55.627 39.243,-54.17 39.616,-53.797 39.616,-53.777 39.672,-53.721 C24.2@39.692,-53.721 ; v1(55.372,-55.245) C25.2@56.202,-55.245 56.243,-55.204 56.243,-54.063 U8.4@56.283,-54.022
  Bottom Layer w0.635: v1(40.5,-35.052) 40.712,-35.263 C88.2@43.256,-35.263 ; R5.1@45.339,-27.907 R6.1@46.609,-27.907
4V@2A: C14.2 C16.2 C22.1 C79.2 C80.2 C81.2 C82.2 C83.2 C105.1 D8.1 L3.2 R77.2 U5.34 U5.35 | length 15.3
  Power Plane w0.203: v1(70.358,-38.481) 70.415,-38.538 70.415,-38.879 70.651,-39.116 71.374,-39.116 72.009,-38.481 v1(72.009,-32.766)
  Bottom Layer w0.203: R77.2@69.53,-38.227 69.555,-38.227 69.778,-38.45 70.327,-38.45 v1(70.358,-38.481)
  Bottom Layer w1.27: C105.1@89.074,-14.224 89.074,-16.938 89.408,-17.272 C105.1@89.408,-14.224
  other v1: 74.422,-33.147 76.835,-33.147 74.422,-31.75 76.835,-31.75 89.789,-19.05
5V@2A: C12.2 C13.2 C15.2 C69.2 C70.2 C71.2 C72.2 C73.2 D2.2 D12.2 J10.3 J14.A4 J14.A9 J14.B4 J14.B9 L2.2 R19.1 R74.2 U4.11 U4.17 U4.18 U8.15 U15.1 U15.3 | length 108.4
  Top Layer w0.203: v1(70.358,-52.451) 70.358,-52.371 70.485,-52.244 v1(70.485,-48.133) ; U4.11@113.963,-51.76 113.976,-51.747 113.976,-51.251
  Top Layer w0.305: U15.1@101.824,-52.771 U15.1@102.024,-52.771 ; U15.3@102.024,-54.671 102.387,-54.308 102.396,-54.308 102.578,-54.126 102.578,-53.316 102.429,-53.167 102.42,-53.167 U15.1@102.024,-52.771 ; v1(102.616,-49.657) 102.616,-51.979 102.172,-52.423 102.172,-52.623 U15.1@102.024,-52.771
  Top Layer w0.508: J14.A4@72.771,-65.096 J14.B9@74.171,-65.096 ; J14.A9@72.771,-60.496 J14.B4@74.171,-60.496 ; v1(108.077,-49.784) 108.145,-49.716 C15.2@108.839,-49.716 C12.2@109.855,-49.716 110.363,-49.716 110.744,-50.097 110.744,-51.816 110.617,-51.943
  Top Layer w0.635: D2.2@80.899,-56.379 80.952,-56.432 v1(80.952,-58.166) ; U15.3@101.824,-54.671 101.989,-54.671 102.007,-54.688 102.007,-54.853 102.362,-55.209 v1(102.362,-59.69)
  Power Plane w0.203: v1(60.198,-52.324) 60.325,-52.451 64.135,-52.451 ; v1(64.135,-48.133) v1(70.485,-48.133)
  Power Plane w0.305: 64.135,-52.451 v1(70.358,-52.451)
  Power Plane w0.406: v1(102.616,-49.657) 103.378,-50.419 107.442,-50.419 v1(108.077,-49.784) 110.473,-49.784 110.981,-50.292 113.385,-50.292 v1(114.227,-51.134)
  Power Plane w0.508: J14.A4@72.771,-65.096 J14.B9@74.171,-65.096 ; J14.A9@72.771,-60.496 J14.B4@74.171,-60.496
  Power Plane w0.635: v1(70.485,-56.007) 72.644,-58.166 v1(80.952,-58.166) 83.947,-58.166 85.424,-59.643 102.315,-59.643 v1(102.362,-59.69)
  Bottom Layer w0.152: D12.2@72.811,-58.046 72.811,-58.427 73.48,-59.096 73.48,-60.014 73.512,-60.045 73.512,-60.496
  Bottom Layer w0.203: U8.15@59.083,-52.522 59.92,-52.522 60.118,-52.324 v1(60.198,-52.324)
  Bottom Layer w0.305: v1(64.135,-48.133) 64.137,-48.135 65.403,-48.135 R74.2@65.405,-48.136
  Bottom Layer w0.508: J14.A9@72.829,-60.519 72.852,-60.496 73.512,-60.496 J14.B4@74.171,-60.496
  Bottom Layer w0.635: L2.2@74.676,-55.318 75.301,-55.318 75.858,-54.761 75.858,-52.031 77.47,-50.419 81.12,-50.419 81.628,-49.911 81.653,-49.911 81.661,-49.903 R19.1@81.661,-49.878
  other v1: 70.485,-54.737 70.485,-53.594
ACN: C52.1 C54.1 R54.1 U11.2 | length 19.4
  Top Layer w0.203: v1(22.503,-34.875) 22.503,-34.854 23.241,-34.116 23.241,-22.606 24.327,-21.52 24.327,-20.758 v1(24.384,-20.701)
  Bottom Layer w0.203: R54.1@22.446,-21.082 22.471,-21.082 22.694,-20.859 22.694,-20.834 22.827,-20.701 23.563,-20.701 C52.1@23.749,-20.887 23.935,-20.701 24.464,-20.701 24.637,-20.874 24.879,-20.874 C54.1@25.087,-21.082 ; v1(22.503,-34.875) 22.556,-34.875 22.749,-35.068 U11.2@22.749,-36.1
ACP: C52.2 C53.1 R53.1 U11.3 | length 20
  Top Layer w0.203: v1(23.356,-34.875) 23.413,-34.819 23.413,-34.375 23.546,-34.243 23.546,-22.732 24.888,-21.39 24.888,-20.443 v1(24.384,-19.939)
  Bottom Layer w0.203: R53.1@22.446,-19.685 22.669,-19.908 23.036,-19.908 23.134,-20.007 C52.2@23.749,-20.007 23.817,-19.939 v1(24.384,-19.939) ; U11.3@23.149,-36.1 23.149,-35.163 23.356,-34.956 v1(23.356,-34.875) ; v1@24.316,-20.007 24.892,-20.007 C53.1@25.087,-19.812
AFE_CS: U1.23 U4.27 | length 98.2
  Top Layer w0.203: v1(80.137,-22.479) 80.137,-35.306 80.196,-35.247 v1(80.242,-35.247) ; v1(103.251,-53.848) 103.251,-44.143 103.784,-43.61 v1(103.784,-33.905) ; v1(107.182,-55.108) 107.188,-55.114 107.188,-55.118 107.692,-55.622 108.416,-55.622 108.628,-55.41 U4.27@108.813,-55.41
  Power Plane w0.203: v1(48.089,-22.615) 80.018,-22.615 80.137,-22.496 v1(80.137,-22.479) ; v1(80.242,-35.247) 91.371,-35.247 92.71,-33.909 103.759,-33.909 103.763,-33.905 v1(103.784,-33.905) ; v1(103.251,-53.848) 105.537,-53.848 106.797,-55.108 v1(107.182,-55.108)
  Bottom Layer w0.203: U1.23@47.866,-24.999 47.866,-22.873 48.089,-22.65 v1(48.089,-22.615)
AFE_LED_ALM: U1.7 U4.22 | length 90.9
  Top Layer w0.203: v1(72.898,-51.943) 72.898,-16.383 v1(73.025,-16.256) ; v1(105.791,-52.324) 106.807,-52.324 107.393,-52.91 U4.22@108.813,-52.91
  Power Plane w0.203: v1(58.293,-14.859) 59.69,-16.256 v1(73.025,-16.256) ; v1(72.898,-51.943) 81.661,-51.943 81.886,-52.168 93.951,-52.168 96.52,-54.737 100.33,-54.737 102.743,-52.324 v1(105.791,-52.324)
  Bottom Layer w0.203: v1(58.293,-14.859) U1.7@59.791,-14.859
AFE_READY: U1.10 U4.28 | length 96.2
  Top Layer w0.203: v1(78.867,-36.957) v1(78.867,-18.415) ; v1(89.916,-36.957) 89.916,-32.258 89.924,-32.266 v1(89.924,-32.383) ; v1(99.187,-32.385) 99.906,-33.104 v1(99.906,-49.784) ; v1(106.172,-55.372) 106.734,-55.372 107.288,-55.927 108.542,-55.927 108.546,-55.923 108.8,-55.923 U4.28@108.813,-55.91
  Power Plane w0.203: v1(62.428,-18.316) 78.768,-18.316 v1(78.867,-18.415) ; v1(78.867,-36.957) v1(89.916,-36.957) ; v1(89.924,-32.383) 99.185,-32.383 v1(99.187,-32.385) ; v1(100.584,-55.753) 100.965,-55.372 v1(106.172,-55.372)
  Bottom Layer w0.203: U1.10@59.791,-18.669 62.103,-18.669 62.456,-18.316 v1(62.428,-18.316) ; v1(99.906,-49.784) 99.906,-49.868 101.346,-51.308 101.346,-54.991 v1(100.584,-55.753)
BABY_TEMP: R45.2 U1.12 U9.1 | length 61.5
  Top Layer w0.203: v1(76.607,-21.069) 76.607,-27.114 76.331,-27.391 76.331,-33.532 76.708,-33.909 v1(76.708,-46.355)
  Power Plane w0.203: v1(76.708,-46.355) v1(91.313,-46.355)
  Bottom Layer w0.203: U1.12@59.791,-21.209 68.324,-21.209 68.574,-20.959 76.458,-20.959 76.568,-21.069 v1(76.607,-21.069) ; v1(91.313,-46.355) 91.313,-48.078 91.561,-48.326 U9.1@91.624,-48.326 91.872,-48.574 92.31,-48.574 92.884,-49.149 R45.2@93.539,-49.149
BTST1: C38.2 U11.30 | length 2.7
  Bottom Layer w0.203: C38.2@19.177,-36.425 19.575,-36.823 20.387,-36.823 21.064,-37.5 U11.30@21.476,-37.5
BTST2: C39.2 U11.25 | length 2.5
  Bottom Layer w0.203: C39.2@19.177,-39.672 19.227,-39.722 20.491,-39.722 20.532,-39.762 21.452,-39.762 21.59,-39.624
D_N: J14.A7 J14.B7 R56.2 U1.13 | length 58.4
  Top Layer w0.194: v1(69.596,-24.257) 69.596,-24.34 69.448,-24.488 69.448,-38.764 67.056,-41.156 67.056,-58.674 71.017,-62.635 72.193,-62.635 72.294,-62.534 72.583,-62.534 J14.A7@72.771,-62.346
  Bottom Layer w0.194: U1.13@59.791,-22.479 60.091,-22.479 60.444,-22.832 60.444,-22.84 60.558,-22.953 68.98,-22.953 69.448,-23.421 69.448,-24.026 69.596,-24.174 v1(69.596,-24.257) ; J14.A7@72.771,-62.346 72.984,-62.559 73.021,-62.559 73.422,-62.961 73.422,-62.997 73.671,-63.246 J14.B7@74.171,-63.246 74.46,-62.957 75.466,-62.957 75.524,-62.899 76.247,-62.899 76.361,-63.012 76.361,-63.018 76.589,-63.246 R56.2@76.614,-63.246
D_P: J14.A6 J14.B6 R55.2 U1.14 | length 58.5
  Top Layer w0.194: v1(68.842,-24.257) 69.127,-24.542 69.127,-38.631 66.735,-41.023 66.735,-58.807 70.884,-62.957 72.193,-62.957 72.294,-63.058 72.583,-63.058 J14.A6@72.771,-63.246 73.271,-63.246 73.519,-62.997 73.519,-62.961 73.921,-62.559 73.958,-62.559 J14.B6@74.171,-62.346
  Bottom Layer w0.194: U1.14@59.791,-23.749 60.091,-23.749 60.444,-23.396 60.444,-23.388 60.558,-23.275 68.847,-23.275 69.127,-23.554 69.127,-23.922 68.842,-24.207 v1(68.842,-24.257) ; J14.B6@74.171,-62.346 74.46,-62.635 75.333,-62.635 75.391,-62.577 76.247,-62.577 76.361,-62.464 76.361,-62.458 76.589,-62.23 R55.2@76.614,-62.23
DC_ACTUATORS: C104.1 J3.2 Q1.2 R13.2 R17.1 U7.2 U7.15 U18.1 | length 72.6
  Top Layer w0.203: C104.1@30.884,-39.137 30.882,-39.139 U18.1@29.467,-39.139 29.167,-39.139 28.969,-39.338 28.969,-42.201 28.477,-42.692 28.477,-45.555 33.02,-50.098 Q1.2@33.02,-50.298 ; 33.196,-54.61 34.664,-54.61 v1(34.691,-54.637) ; v1(48.641,-55.245) 50.468,-55.245 R17.1@50.673,-55.04
  Top Layer w1.27: Q1.2@33.02,-50.298 Q1.2@33.196,-50.474 ; Q1.2@33.196,-50.674 35.285,-52.763 37.142,-52.763 v1(37.465,-53.086) ; v1(50.038,-52.197) 50.038,-54.405 50.358,-54.725 50.358,-54.9 50.498,-55.04 R17.1@50.673,-55.04
  Top Layer w2.54: Q1.2@33.196,-50.474 33.196,-50.674 33.196,-54.61 33.196,-57.89 33.351,-58.046 33.351,-63.196 J3.2@33.401,-63.246
  Power Plane w1.27: v1(37.465,-53.086) 37.719,-53.34 48.895,-53.34 v1(50.038,-52.197)
  Bottom Layer w0.203: v1(34.691,-54.637) 36.442,-56.388 40.767,-56.388 42.418,-54.737 42.418,-53.668 41.473,-52.723 U7.2@41.473,-52.498 ; U7.15@42.973,-50.998 43.021,-51.046 43.38,-51.046 43.387,-51.054 44.45,-51.054 v1(48.641,-55.245)
DC_DC_EN: D14.3 R18.2 R73.2 U12.5 U13.5 U14.5 | length 105.9
  Top Layer w0.2: D14.3@28.702,-5.985 v1(28.702,-5.278) R73.2@28.702,-4.572 ; v1(30.607,-32.512) v1(30.607,-18.683) ; v1(33.909,-18.669) v1(33.909,-8.382) ; v1(49.243,-32.549) 49.26,-32.533 49.26,-29.861 v1(49.276,-29.845) ; v1(65.024,-50.292) 65.024,-38.862 v1(66.548,-37.338) v1(66.548,-29.845)
  Power Plane w0.2: v1(30.607,-32.512) v1@49.243,-32.512 ; v1(30.607,-18.683) 30.614,-18.676 33.902,-18.676 v1(33.909,-18.669) ; v1(49.276,-29.845) v1(66.548,-29.845) ; v1(66.548,-37.338) 70.15,-37.338 70.277,-37.465 v1(70.358,-37.465)
  Bottom Layer w0.2: v1(28.702,-5.278) 31.086,-5.278 32.03,-6.223 33.02,-6.223 33.909,-7.112 v1(33.909,-8.382) ; v1(49.243,-32.549) 49.26,-32.566 49.26,-33.661 U14.5@49.276,-33.677 ; v1(65.024,-50.292) 65.54,-49.776 U12.5@67.862,-49.776 ; R18.2@65.405,-29.878 65.438,-29.845 v1(66.548,-29.845) ; v1(70.358,-37.465) 70.415,-37.408 U13.5@70.415,-36.601
DEBUG_RX: J1.5 U1.36 | length 10.5
  Bottom Layer w0.203: J1.5@32.512,-14.097 34.29,-12.319 U1.36@42.291,-12.319
DEBUG_TX: J1.3 U1.37 | length 10.1
  Top Layer w0.203: J1.3@35.052,-14.097 35.052,-11.303 v1(35.306,-11.049)
  Bottom Layer w0.203: v1(35.306,-11.049) U1.37@42.291,-11.049
DGND: C1.1 C2.1 C3.1 C4.1 C5.1 C6.1 C7.1 C8.1 C9.1 C10.1 C11.1 C12.1 C13.1 C14.1 C15.1 C16.1 C17.1 C18.1 C19.1 C20.1 C21.1 C22.2 C23.1 C24.1 C25.1 C26.1 C27.1 C28.1 C29.1 C30.2 C31.2 C32.2 C33.2 C34.2 C35.2 C36.2 C37.2 C40.1 C41.1 C42.1 C44.2 C45.2 C46.2 C47.2 C48.2 C49.2 C50.2 C51.2 C53.2 C54.2 C55.1 C56.1 C58.2 C59.2 C60.1 C61.1 C62.1 C63.2 C64.2 C65.2 C66.2 C67.2 C69.1 C70.1 C71.1 C72.1 C73.1 C74.1 C75.1 C76.1 C77.1 C79.1 C80.1 C81.1 C82.1 C83.1 C84.1 C85.1 C86.1 C88.1 C89.1 C90.1 C91.1 C92.1 C93.1 C94.1 C95.1 C96.1 C97.1 C98.1 C99.1 C101.2 C102.2 C104.2 C105.2 C107.2 D1.1 D4.1 D5.1 D6.1 D7.1 D8.2 D9.2 D10.1 D11.1 D12.1 D13.2 D15.1 J1.4 J5.2 J6.7 J6.10 J6.11 J7.6 J7.7 J8.2 J9.1 J10.1 J11.2 J12.G1 J12.G2 J12.G3 J12.G4 J12.S4 J13.A1 J13.A12 J13.B1 J13.B12 J14.A1 J14.A12 J14.B1 J14.B12 NT1.1 NT1.2 pad.0@15.621,-64.262 pad.0@22.621,-14.756 pad.0@116.793,-23.011 Q2.3 Q3.2 Q4.2 Q5.3 Q6.2 Q11.1-2-3 Q12.1-2-3 R3.1 R4.1 R7.2 R11.1 R12.1 R15.1 R21.1 R23.1 R37.1 R63.1 R68.2 R69.2 R70.2 R73.1 R76.1 R78.1 R80.1 R82.2 RF_PCB1.2 S2.2 U1.1 U1.40 U1.41 U1.42 U1.43 U1.44 U1.45 U1.46 U1.47 U1.48 U1.49 U2.2 U3.1 U4.3 U4.8 U4.12 U4.13 U4.16 U4.19 U4.32 U4.36 U4.40 U4.41 U5.8 U5.13 U5.19 U5.21 U5.23 U5.27 U5.30 U5.31 U5.33 U5.36 U5.37 U5.39 U7.3 U7.17@41.148,-50.673 U8.3 U8.5 U8.17@57.258,-52.197 U9.2 U9.6 U10.2 U11.5 U11.14 U11.27 U11.33 U12.3 U13.3 U14.3 U15.2 U16.2 U17.2 U18.2 U18.4 | length 18.4
  Top Layer w0.203: U4.32@109.963,-57.56 109.963,-56.41 v3(111.028,-55.345) U4.41@111.713,-54.66 v3(112.398,-55.345) 113.963,-56.91 U4.40@113.963,-57.56
  Bottom Layer w0.203: J9.1@8.636,-60.198 8.509,-60.325 8.382,-60.325 J9.1@8.636,-60.071 ; 14.478,-38.608 v1(17.701,-38.608) 18.336,-37.973 C55.1@18.356,-37.973 18.376,-37.973 18.584,-38.181 18.584,-38.388 19.043,-38.847 20.547,-38.847 20.694,-38.7 NT1.1@20.86,-38.7 U11.27@21.749,-38.7 23.149,-38.7 U11.33@23.749,-38.1